# EAGLE board edition4-mainpart-5 (EAGLE 9.6.2)
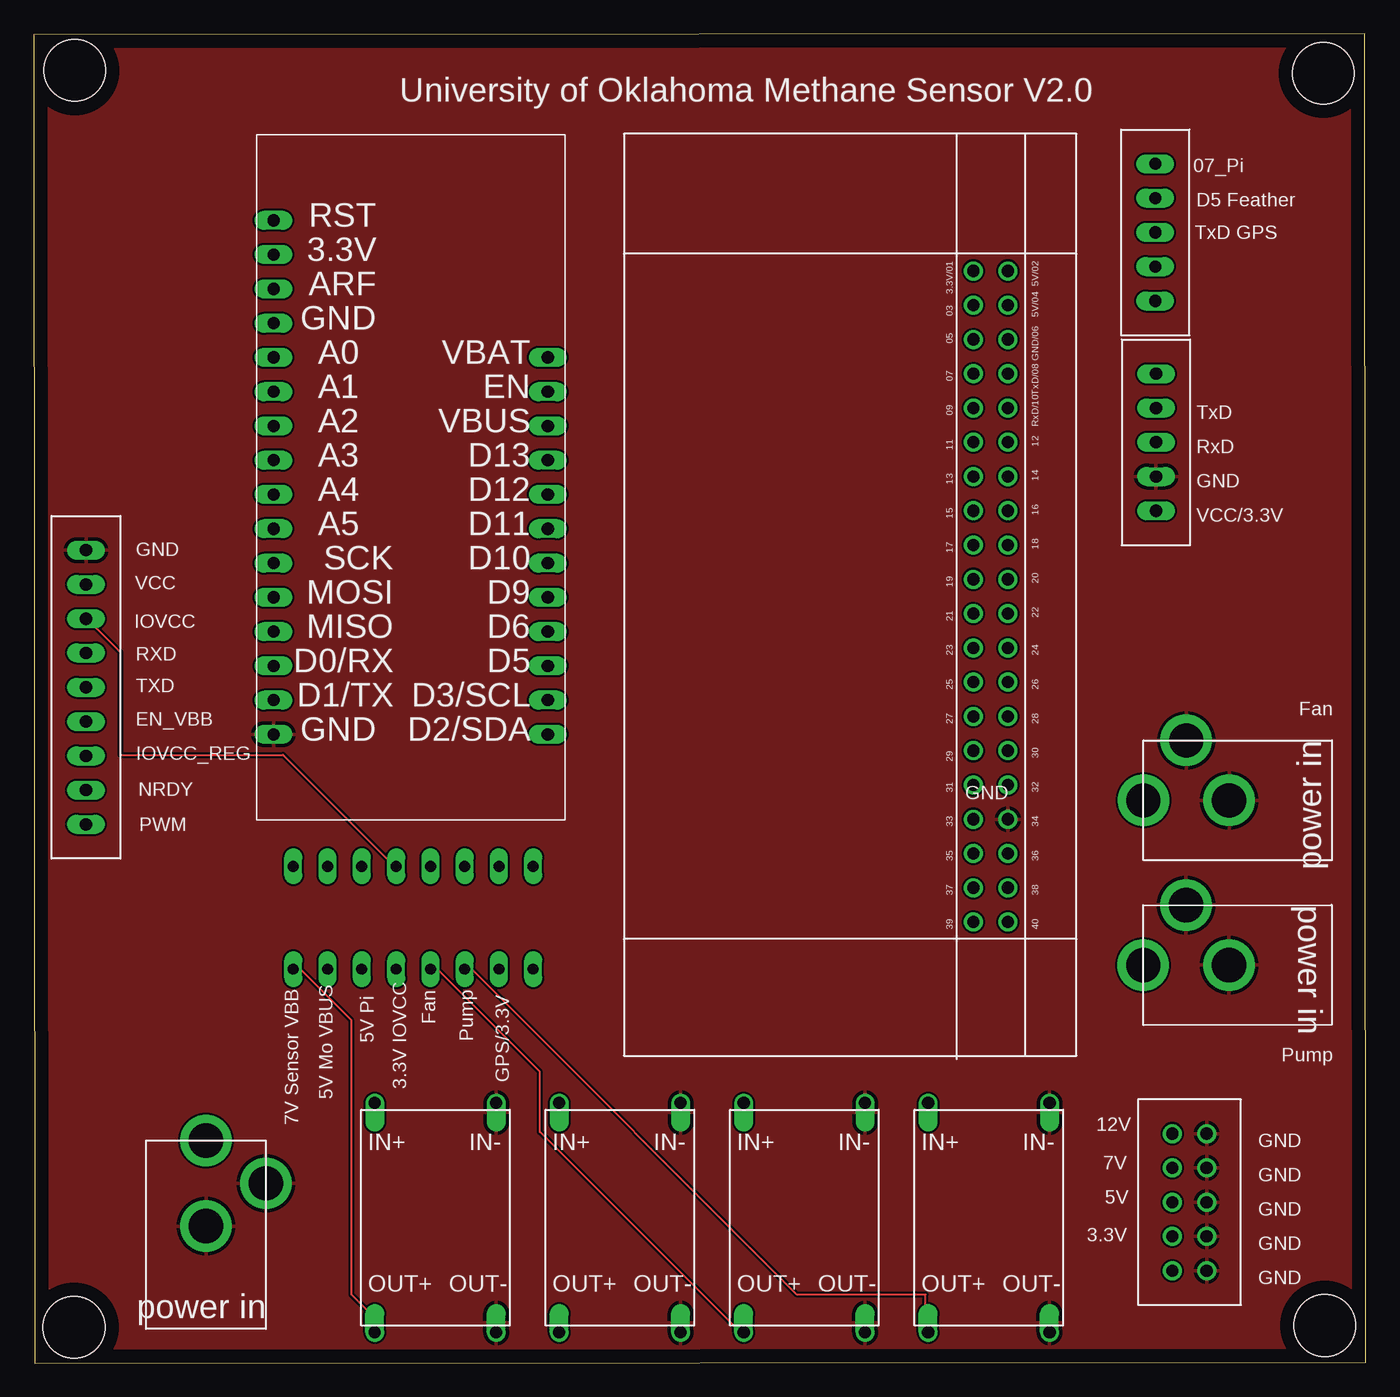
[diagram p0: board, top side]
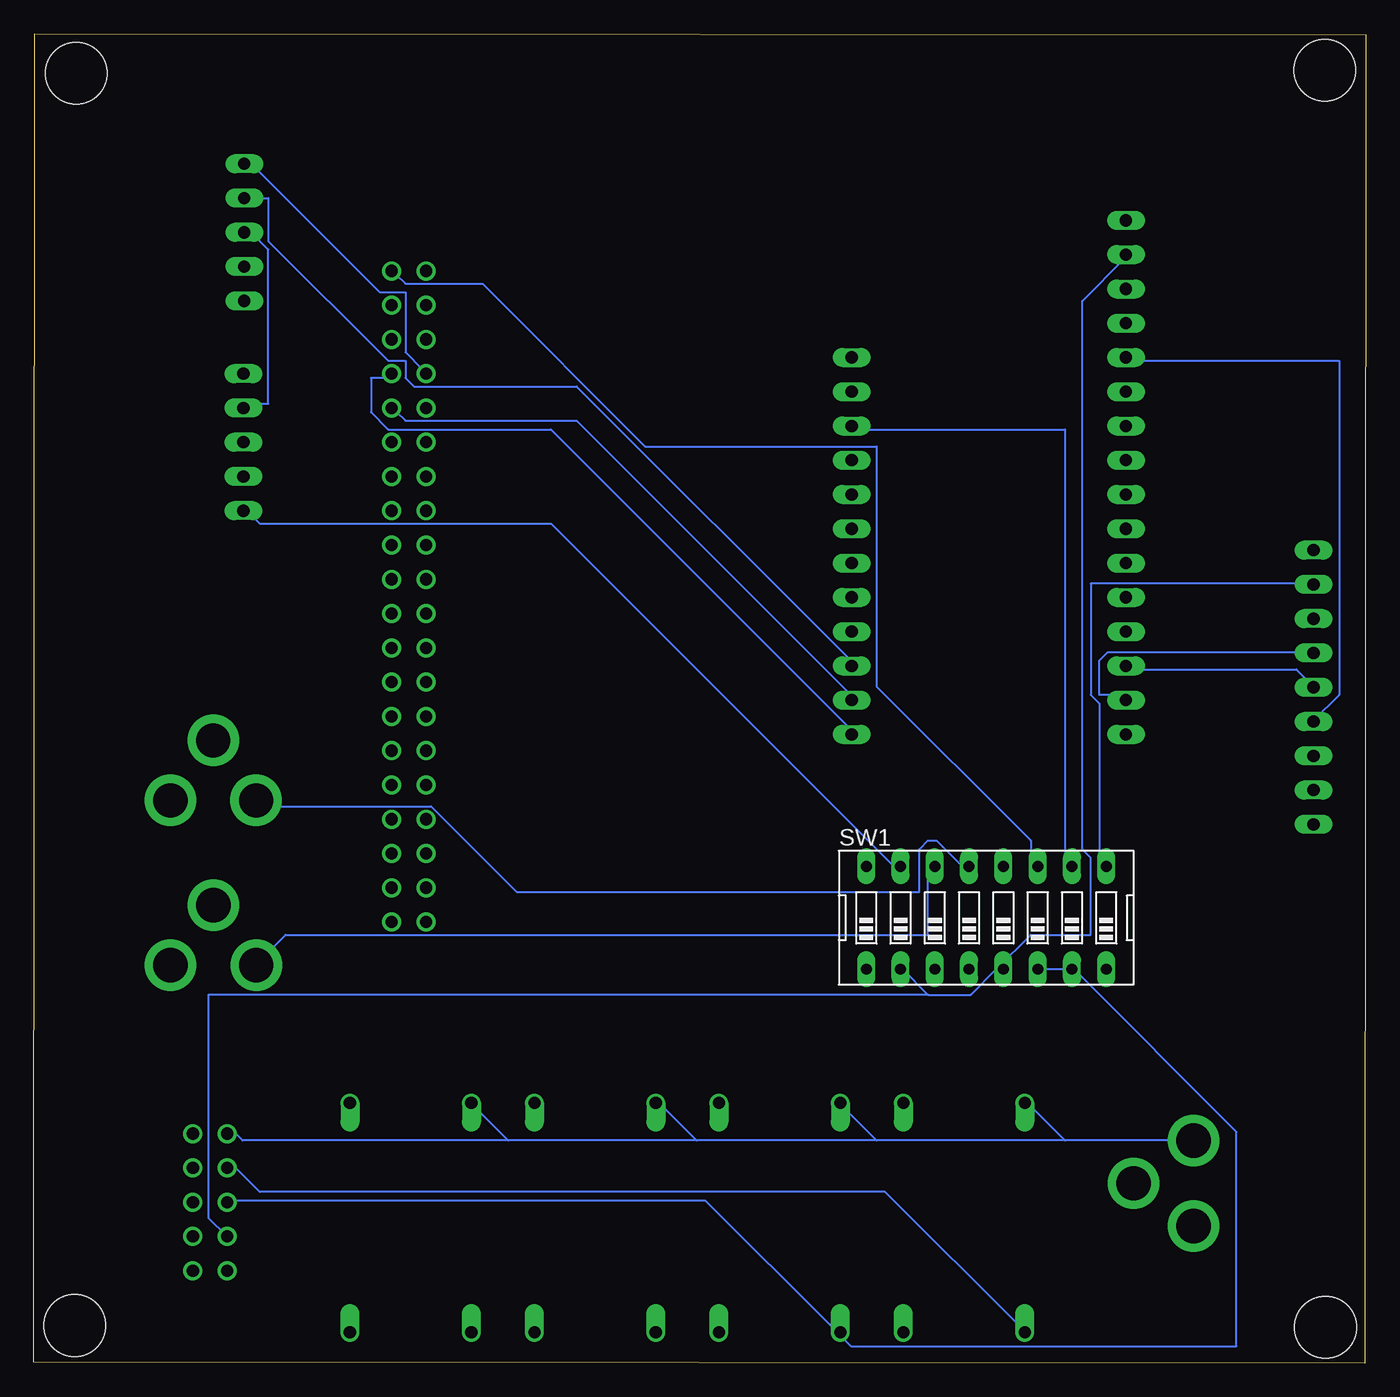
[diagram p1: board, bottom side, seen from below]

Size 98.73 x 98.54 mm. Coordinates in mm from the lower left corner, seen from the top.
Outline: 0.06,0 98.73,0.06 98.67,98.54 0,98.48 0.06,0
Copper layers (1*16): Top 0.035mm / dielectric 1.5mm / Bottom 0.035mm
Design rules "default": minimum track width 6mil, minimum drill 0.35mm, track to track 6mil, track to pad 6mil, pad to pad 6mil, via to via 6mil, smd to smd 6mil, copper to edge 40mil, drill to drill 6mil, minimum pad ring 10mil, minimum via ring 8mil, stop-mask expansion 4mil, vias tented up to drill 0mil, thermal gap 10mil
Holes 4.57 mm at 2.98,2.67 3.05,95.82 95.57,95.63 95.69,2.79

## Footprints (pad centres in the part's own frame; a part is rotated, then mirrored left to right if it is on the bottom)
EDG-08 = drill 0.813 long: 1 -8.89,-3.81; 2 -6.35,-3.81; 3 -3.81,-3.81; 4 -1.27,-3.81; 5 1.27,-3.81; 6 3.81,-3.81; 7 6.35,-3.81; 8 8.89,-3.81; 9 8.89,3.81; 10 6.35,3.81; 11 3.81,3.81; 12 1.27,3.81; 13 -1.27,3.81; 14 -3.81,3.81; 15 -6.35,3.81; 16 -8.89,3.81
MH-MINI-360 = drill 0.9 offset: P$1 0,1; P$2 9,1; P$3 9,-16; P$4 0,-16
POWERIN = drill 2.54 pad 3.81: P$1 4.445,-13.97; P$2 4.445,-7.62; P$3 0,-10.795
PIN = drill 0.9 pad 1.143 long: P$1 0,-7.62; P$2 0,-5.08; P$3 0,-2.54; P$4 0,0; P$5 0,2.54
FEATHER = drill 0.9 pad 1.143 long: P$1 0,-5.08; P$2 0,-7.62; P$3 0,-10.16; P$4 0,-12.7; P$5 0,-15.24; P$6 0,-17.78; P$7 0,-20.32; P$8 0,-22.86; P$9 0,-25.4; P$10 0,-27.94; P$11 0,-30.48; P$12 0,-33.02; P$13 20.32,-5.08; P$14 20.32,-7.62; P$15 20.32,-10.16; P$16 20.32,-12.7; P$17 20.32,-15.24; P$18 20.32,-17.78; P$19 20.32,-20.32; P$20 20.32,-22.86; P$21 20.32,-25.4; P$22 20.32,-27.94; P$23 20.32,-30.48; P$24 20.32,-33.02; P$25 20.32,-35.56; P$26 20.32,-38.1; P$27 20.32,-40.64; P$28 20.32,-43.18
RASPBERRYPI = drill 0.9 pad 1.143: P$1 10.16,-5.08; P$2 12.7,-5.08; P$3 15.24,-5.08; P$4 17.78,-5.08; P$5 20.32,-5.08; P$6 22.86,-5.08; P$7 25.4,-5.08; P$8 27.94,-5.08; P$9 30.48,-5.08; P$10 33.02,-5.08; P$11 35.56,-5.08; P$12 38.1,-5.08; P$13 40.64,-5.08; P$14 43.18,-5.08; P$15 45.72,-5.08; P$16 48.26,-5.08; P$17 50.8,-5.08; P$18 53.34,-5.08; P$19 55.88,-5.08; P$20 58.42,-5.08; P$21 10.16,-7.62; P$22 12.7,-7.62; P$23 15.24,-7.62; P$24 17.78,-7.62; P$25 20.32,-7.62; P$26 22.86,-7.62; P$27 25.4,-7.62; P$28 27.94,-7.62; P$29 30.48,-7.62; P$30 33.02,-7.62; P$31 35.56,-7.62; P$32 38.1,-7.62; P$33 40.64,-7.62; P$34 43.18,-7.62; P$35 45.72,-7.62; P$36 48.26,-7.62; P$37 50.8,-7.62; P$38 53.34,-7.62; P$39 55.88,-7.62; P$40 58.42,-7.62
2X5FEET = drill 0.9: P$1 0,-2.54; P$2 0,-5.08; P$3 0,-7.62; P$4 0,-10.16; P$5 0,-12.7; P$6 2.54,-2.54; P$7 2.54,-5.08; P$8 2.54,-7.62; P$9 2.54,-10.16; P$10 2.54,-12.7
9FEETPIN = drill 0.9 long: P$1 0,2.54; P$2 0,0; P$3 0,-2.54; P$4 0,-5.08; P$5 0,-7.62; P$6 0,-10.16; P$7 0,-12.7; P$8 0,-15.24; P$9 0,-17.78

## Placement (x,y rotation side)
SW1  [EDG-08]  28.13,33.02 0 bottom
U$1  MH-MINI-360  [MH-MINI-360]  52.62,18.29 0 top
U$2  MH-MINI-360  [MH-MINI-360]  38.95,18.29 0 top
U$3  POWER  [POWERIN]  17.21,2.54 180 top
U$4  POWER  [POWERIN]  96.2,33.97 270.1 top
U$5  POWER  [POWERIN]  96.22,46.16 270 top
U$6  MH-MINI-360  [MH-MINI-360]  25.27,18.29 0 top
U$7  MH-MINI-360  [MH-MINI-360]  66.29,18.29 0 top
U$8  PIN  [PIN]  83.19,70.8 0 top
U$9  PIN  [PIN]  83.12,86.36 0 top
U$10  FEATHER  [FEATHER]  38.1,41.53 180 top
U$11  RASPBERRYPI  [RASPBERRYPI]  77.28,91.12 270 top
U$14  2X5FEET  [2X5FEET]  84.39,19.56 0 top
U$15  9FEETPIN  [9FEETPIN]  3.87,57.72 0 top

## Library data of the parts
SW1 = special
U$1-U$8 U$10 U$11 U$14 U$15 = untitled
U$9 = untitled (1)

## Nets
GND: U$1.P$2 U$1.P$3 U$2.P$2 U$2.P$3 U$3.P$2 U$3.P$3 U$4.P$2 U$4.P$3 U$5.P$2 U$5.P$3 U$6.P$2 U$6.P$3 U$7.P$2 U$7.P$3 U$8.P$2 U$10.P$13 U$11.P$17 U$14.P$6 U$14.P$7 U$14.P$8 U$14.P$9 U$14.P$10 U$15.P$1
N$1: SW1.10 U$10.P$10
N$2: SW1.3 U$7.P$4
N$3: SW1.2 SW1.5 U$10.P$27 U$14.P$4
N$4: SW1.8 U$6.P$4 U$14.P$2
N$5: SW1.9 U$15.P$2
N$6: U$8.P$4 U$9.P$3
N$7: SW1.12 U$15.P$3
N$8: U$10.P$14 U$15.P$4
N$9: U$10.P$15 U$15.P$5
N$10: U$9.P$4 U$10.P$3
N$11: SW1.6 SW1.7 U$2.P$4 U$14.P$3
N$12: SW1.11 U$11.P$1
N$13: SW1.15 U$8.P$1
N$14: SW1.13 U$5.P$1
N$15: U$10.P$1 U$11.P$4
N$16: U$10.P$2 U$11.P$5
N$17: SW1.4 U$1.P$4
N$18: U$1.P$1 U$2.P$1 U$3.P$1 U$6.P$1 U$7.P$1 U$14.P$1
N$19: SW1.14 U$4.P$1
N$20: U$9.P$5 U$11.P$24
N$21: U$10.P$24 U$15.P$6

## Tracks (layer width: path | path; a pad name or v marks a point on that pad's centre or on a via)
GND
  pour Top: 0.06,98.3 98.87,98.3 98.87,92.84 98.87,-0.25 -0.19,-0.25 -0.19,98.3
N$1
  Bottom 0.152: SW1.10 22.29,36.83 22.29,69.22 37.53,69.22 U$10.P$10
N$2
  Top 0.152: SW1.3 32.45,29.21 56.58,5.08 66.1,5.08 66.1,2.54 U$7.P$4
N$3
  Bottom 0.152: 27.37,29.21 29.27,27.3 32.45,27.3 | 32.45,27.3 34.35,29.21 SW1.2 | U$14.P$4 85.79,10.79 85.79,27.3 32.45,27.3 | 27.37,29.21 24.83,31.75 20.38,31.75 20.38,37.47 21.02,38.1 21.02,78.74 17.84,81.92 U$10.P$27 | 27.37,29.21 SW1.5
N$4
  Top 0.152: SW1.8 19.75,29.21 23.56,25.4 23.56,5.08 24.83,3.81 24.83,2.54 U$6.P$4
  Bottom 0.152: U$14.P$2 83.88,14.61 81.98,12.7 35.62,12.7 25.46,2.54 U$6.P$4
N$5
  Bottom 0.152: SW1.9 19.75,36.83 19.75,48.9 20.38,49.53 20.38,57.78 3.87,57.78 U$15.P$2
N$6
  Bottom 0.152: U$9.P$3 82.61,83.82 81.34,82.55 81.34,71.12 82.61,71.12 U$8.P$4
N$7
  Top 0.152: SW1.12 26.73,36.83 18.48,45.09 6.41,45.09 6.41,52.7 3.87,55.24 U$15.P$3
N$8
  Bottom 0.152: U$15.P$4 3.87,52.7 19.11,52.7 19.75,52.07 19.75,49.53 17.84,49.53 U$10.P$14
N$9
  Bottom 0.152: U$15.P$5 3.87,50.16 5.14,51.44 17.21,51.44 U$10.P$15
N$10
  Bottom 0.152: U$9.P$4 81.34,86.36 81.34,83.19 72.45,74.3 71.18,74.3 71.18,73.03 70.55,72.39 58.48,72.39 38.16,52.07 U$10.P$3
N$11
  Bottom 0.152: SW1.6 SW1.7 21.65,29.21 9.59,17.14 9.59,1.27 38.16,1.27 38.8,1.91 U$2.P$4 39.43,2.54 48.96,12.06 83.88,12.06 U$14.P$3
N$12
  Bottom 0.152: SW1.11 24.83,36.83 24.83,38.73 36.26,50.16 36.26,67.94 53.4,67.94 65.47,80.01 71.18,80.01 71.82,80.64 U$11.P$1
N$13
  Bottom 0.152: SW1.15 34.99,36.83 60.39,62.23 81.98,62.23 82.61,62.87 U$8.P$1
N$14
  Bottom 0.152: SW1.13 29.91,36.83 31.81,38.73 32.45,38.73 33.08,38.1 33.08,34.92 62.93,34.92 69.28,41.27 81.98,41.27 U$5.P$1
N$15
  Bottom 0.152: U$10.P$1 38.16,46.99 60.39,69.22 72.45,69.22 73.72,70.48 73.72,73.03 72.45,73.03 U$11.P$4
N$16
  Bottom 0.152: U$10.P$2 38.16,49.53 58.48,69.85 71.18,69.85 71.82,70.48 U$11.P$5
N$17
  Top 0.152: SW1.4 29.91,29.21 37.53,21.59 37.53,17.14 52.13,2.54 U$1.P$4
N$18
  Bottom 0.152: 22.29,16.51 24.83,19.05 U$6.P$1 | U$3.P$1 22.29,16.51 | 36.26,16.51 38.8,19.05 U$2.P$1 | 22.29,16.51 36.26,16.51 | 49.59,16.51 52.13,19.05 U$1.P$1 | 36.26,16.51 49.59,16.51 | 63.56,16.51 66.1,19.05 U$7.P$1 | 49.59,16.51 63.56,16.51 | 63.56,16.51 83.25,16.51 83.88,17.14 U$14.P$1
N$19
  Bottom 0.152: SW1.14 32.45,36.83 32.45,31.75 80.07,31.75 81.98,29.84 U$4.P$1
N$20
  Bottom 0.152: U$11.P$24 69.91,73.66 71.18,74.93 71.18,79.38 73.09,79.38 82.61,88.9 U$9.P$5
N$21
  Bottom 0.152: U$15.P$6 3.87,47.62 1.97,49.53 1.97,74.3 17.21,74.3 U$10.P$24

## Text on the board
tNames: University of Oklahoma Methane Sensor V2.0 | 07_Pi | D5 Feather | TxD GPS | TxD | RxD | GND | VCC/3.3V | GND | VCC | IOVCC | RXD | TXD | Fan | EN_VBB | IOVCC_REG | NRDY | GND | PWM | Fan | 5V Pi | Pump | Pump | GPS/3.3V | 5V Mo VBUS | 3.3V IOVCC | 7V Sensor VBB | 12V | GND | 7V | GND | 5V | GND | 3.3V | GND | GND